# Altium PCB BOARD.PcbDoc
Units mm, origin at the board's own origin, x right, y up, seen from the top; angles counter-clockwise.
Board outline 25.6 x 34.2 mm, 2 copper layers (Top Layer, Bottom Layer), stack 0.46 mm thick; 48 components, 33 nets, 176 pads, 98 vias.
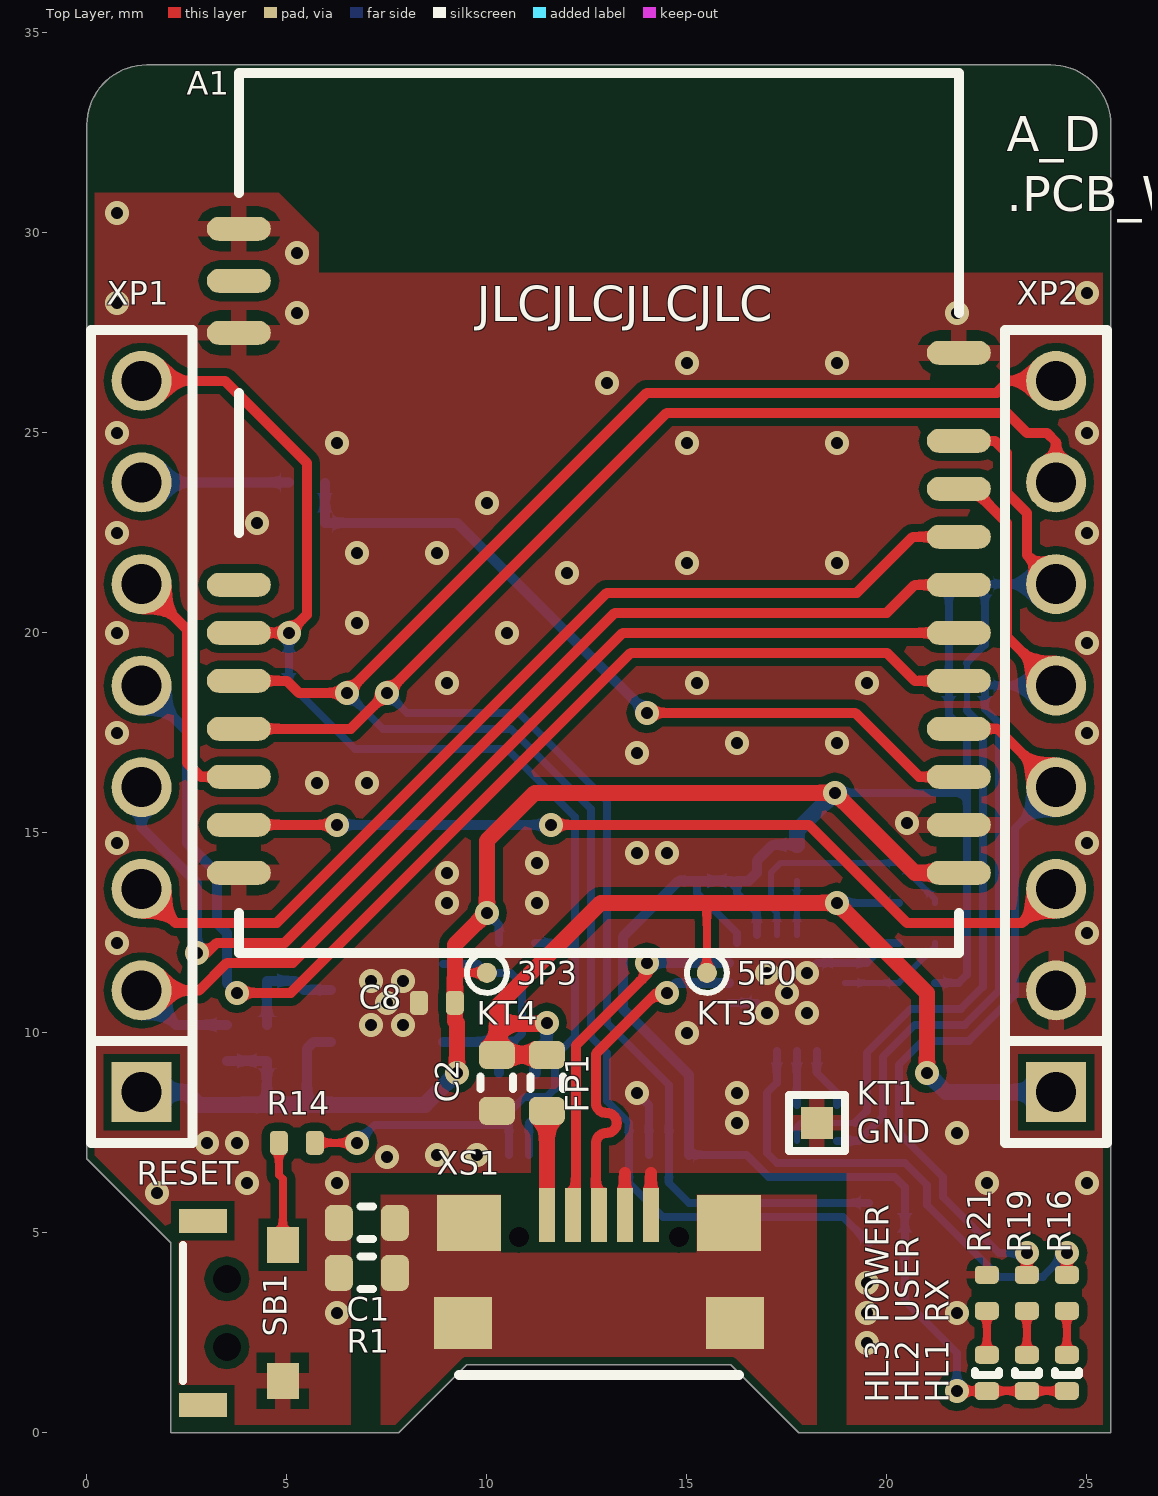
[diagram p0: Top Layer view]
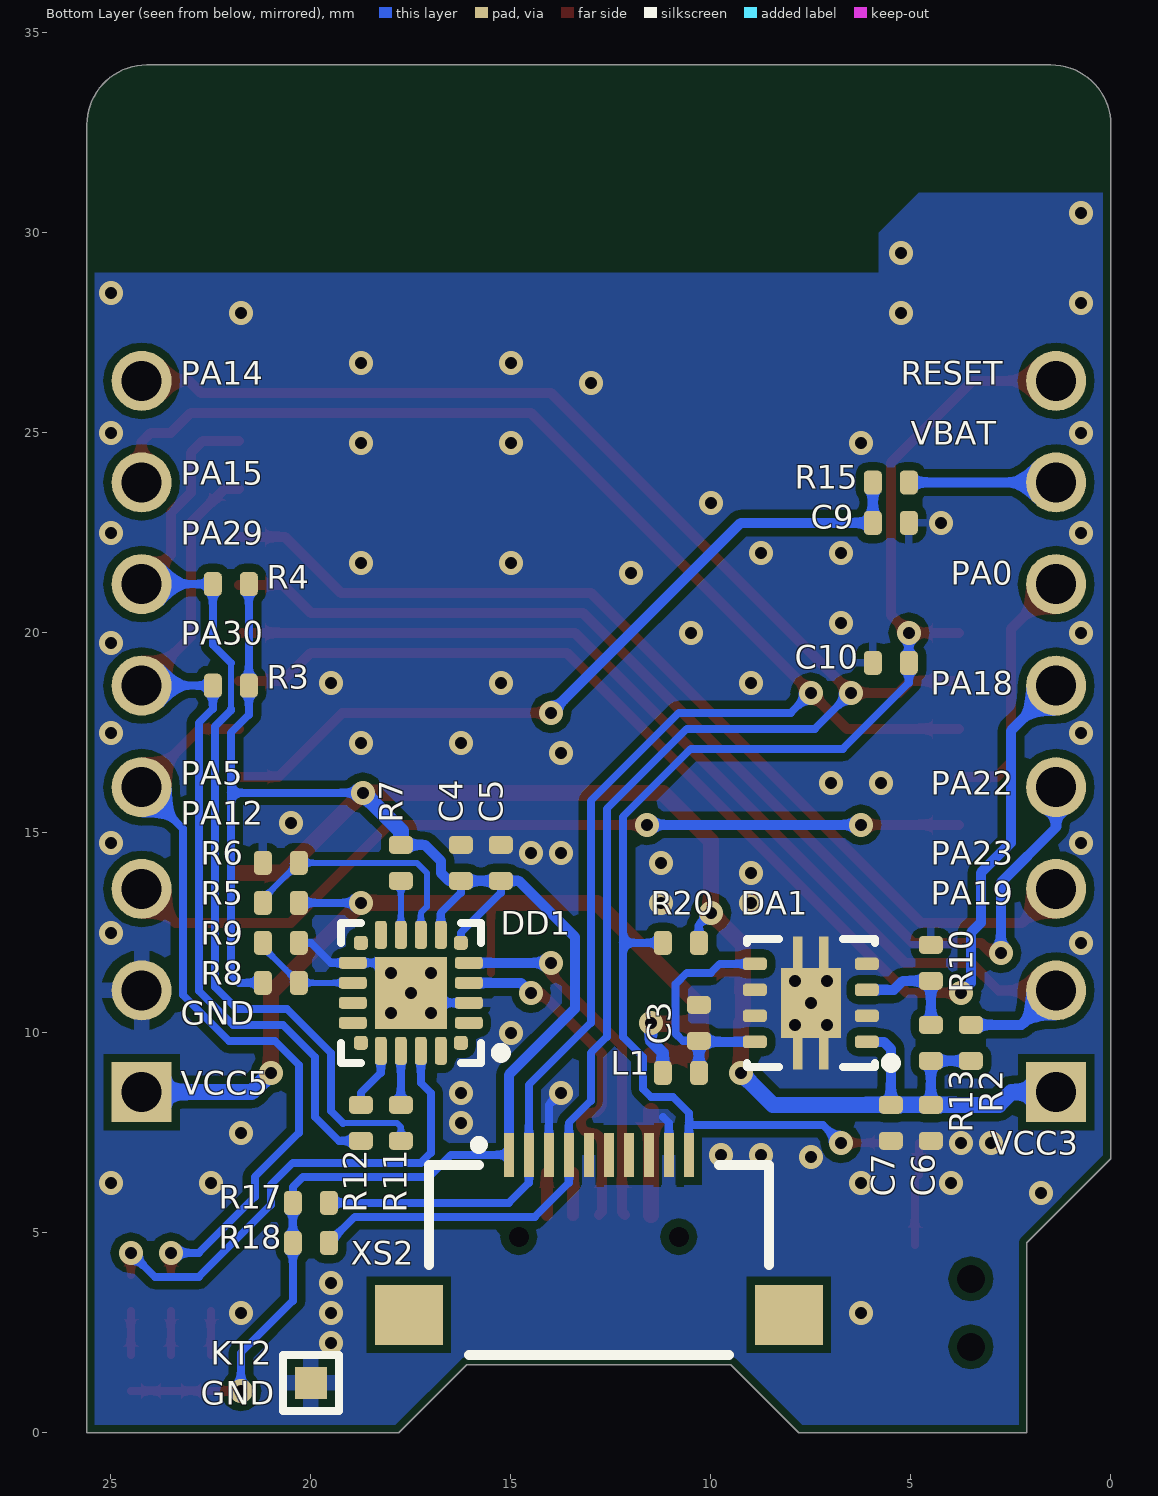
[diagram p1: Bottom Layer view, seen from below]
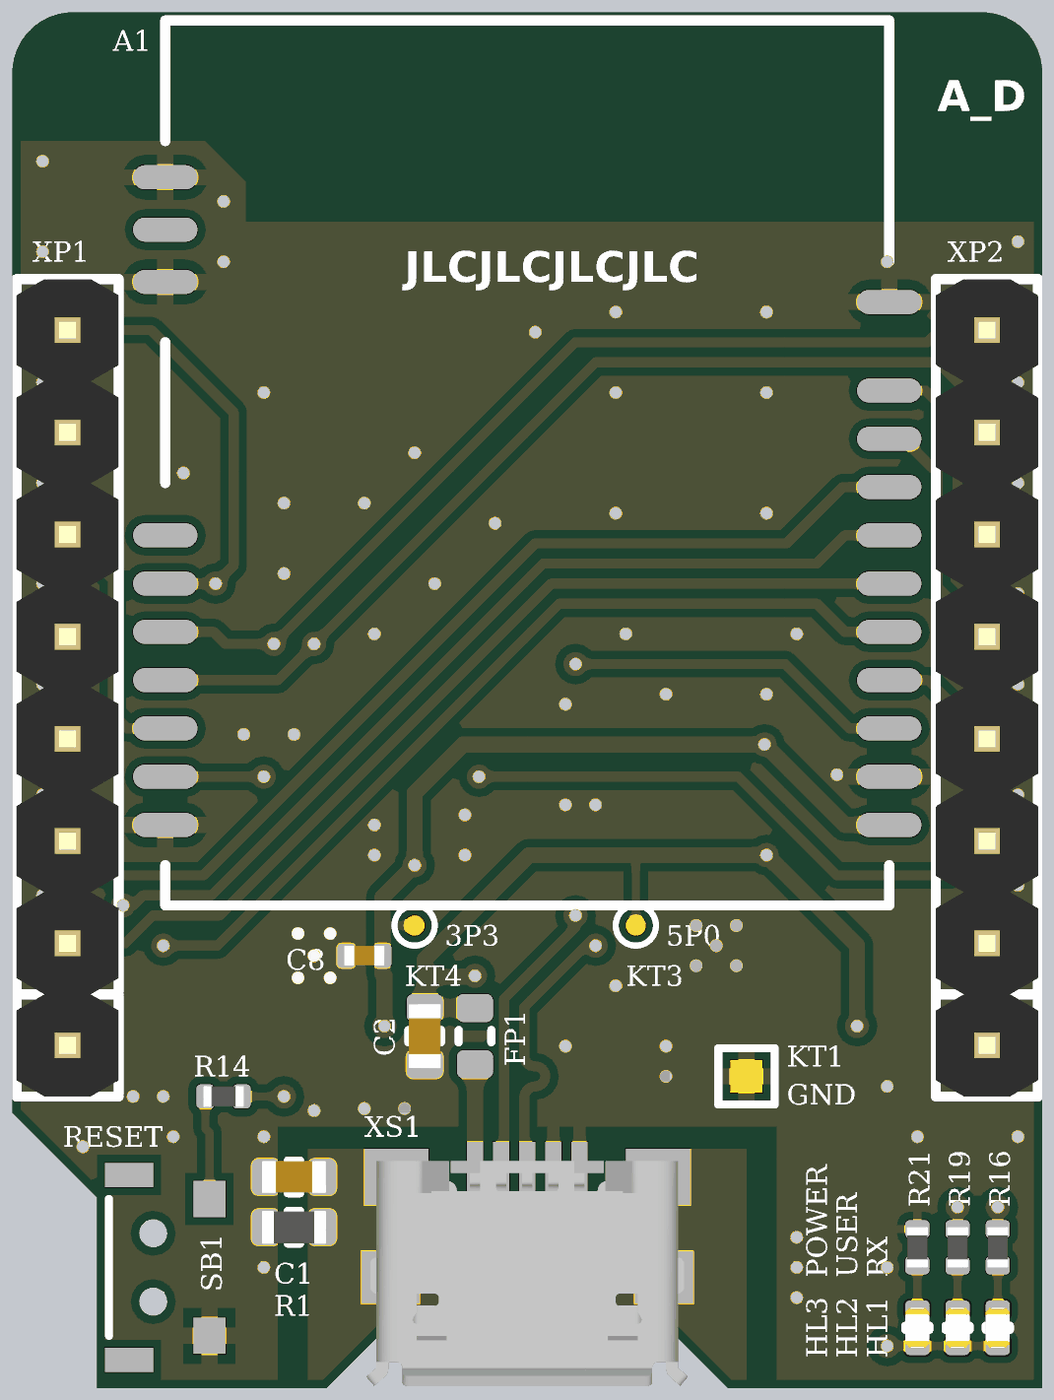
[diagram p2: 3D render of the assembled board from above, using the file's embedded part models]
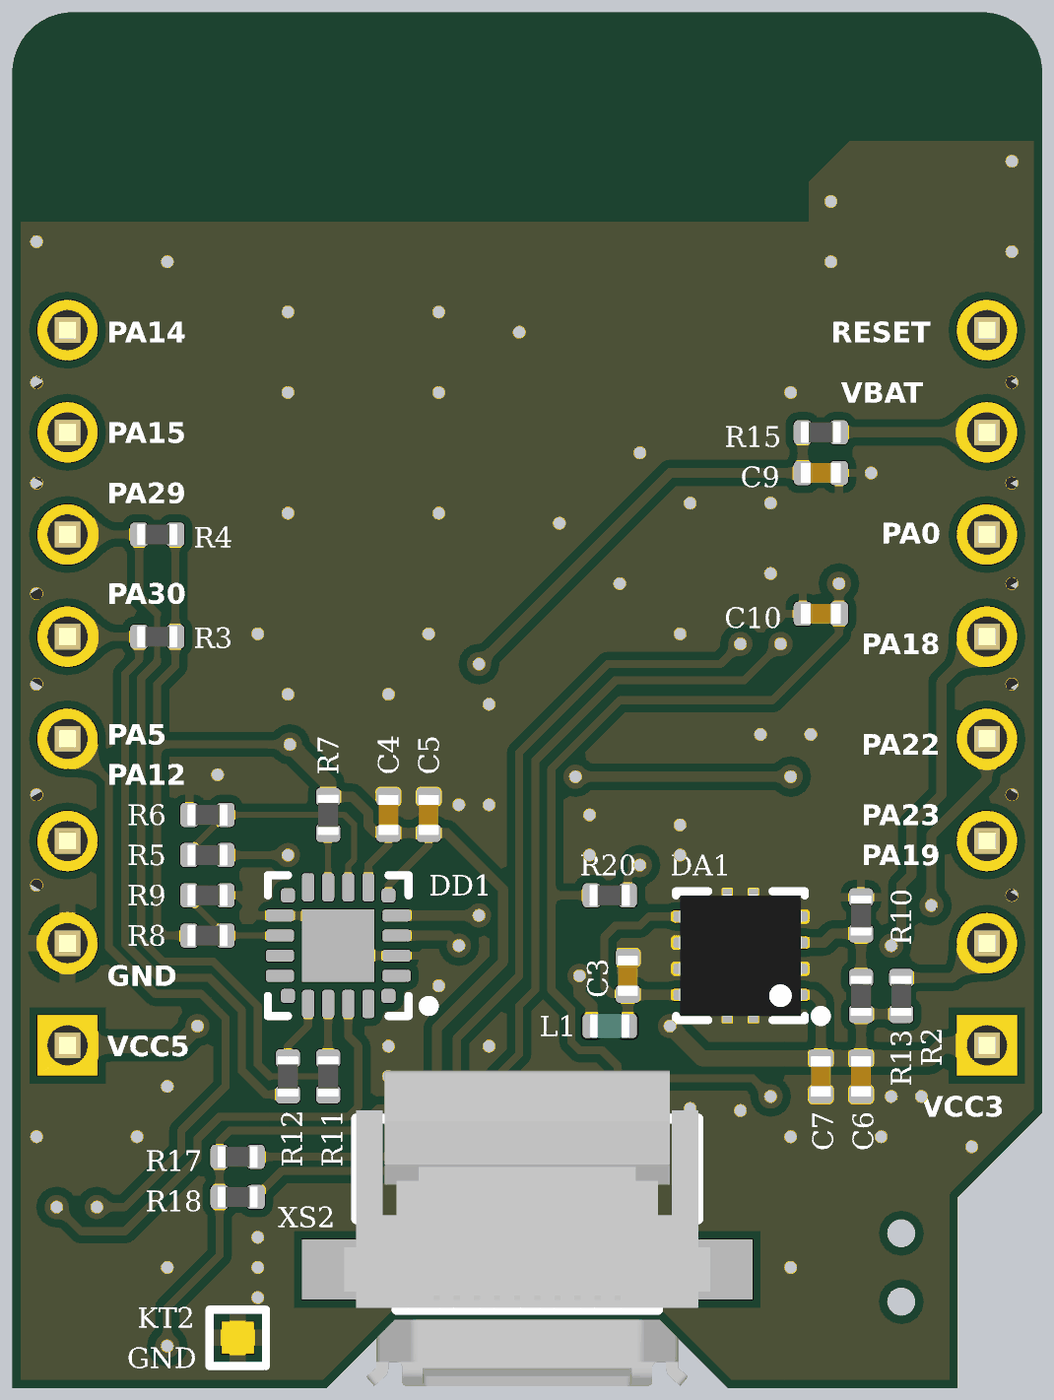
[diagram p3: 3D render of the assembled board from below, using the file's embedded part models]

## Layer stack, top to bottom
Top Solder: solder mask 0.01, Solder Resist, Dk 3.5
Top Layer: signal copper 0.03
Dielectric1: core 0.4, FR-4, Dk 4.2
Bottom Layer: signal copper 0.03
Bottom Solder: solder mask 0.01, Solder Resist, Dk 3.5

## Board outline
2.1,0 2.1,4.75 0,6.85 0,32.7 cw(c1.5,32.7) 1.5,34.2 24.1,34.2 cw(c24.1,32.7) 25.6,32.7 25.6,0 17.8,0 16.1,1.7 9.5,1.7 7.8,0

## Design rules (kind name [scope] priority, off if disabled: settings)
BoardOutlineClearance [All] p1: gap=0.2 ignorepadtopadclearanceinfootprint=FALSE
Clearance Clearance_ANT [InNetClass('ANT_Class') vs InPolygon] p1: gap=0.6 ignorepadtopadclearanceinfootprint=FALSE except(0: Arc-Hole Track-Hole SMDPad-Hole THPad-Hole Via-Hole Fill-Hole Poly-Hole Region-Hole Text-Hole)
Clearance Clearance_GND_Poly [(InNet('GND') AND InPolygon )] p2: gap=0.2 ignorepadtopadclearanceinfootprint=FALSE except(0: Arc-Hole Track-Hole SMDPad-Hole THPad-Hole Via-Hole Fill-Hole Poly-Hole Region-Hole Text-Hole)
Clearance [All] p3: gap=0.15 ignorepadtopadclearanceinfootprint=FALSE except(0: Arc-Hole Track-Hole SMDPad-Hole THPad-Hole Via-Hole Fill-Hole Poly-Hole Region-Hole Text-Hole)
ComponentClearance [All] p1 off: gap=0.25 collisioncheckmode=3 verticalgap=0.25 showdistances=FALSE
DiffPairsRouting [All] p1: maxlimit=0.4 minlimit=0.15 mostfreqgap=0.25 toplayer_minwidth=0.2 toplayer_maxwidth=0.4 toplayer_prefwidth=0.25 bottomlayer_minwidth=0.2 bottomlayer_maxwidth=0.4 bottomlayer_prefwidth=0.25 maxuncoupledlength=12
Height [All] p1: minheight=0 maxheight=25 prefheight=25
HoleSize [All] p1: absolutevalues=TRUE maxlimit=6 minlimit=0.3 maxpercent=80.000 minpercent=20.000
HoleToHoleClearance [All] p1: gap=0.25 allowstackedmicrovias=TRUE
MatchedLengths "Schematic Matched Net Lengths_3" [InNet('USBD_N')] p1: tolerance=1 checknetsindiffpair=TRUE checkdiffpairvsdiffpair=FALSE checkxsignals=FALSE checkothers=FALSE
MatchedLengths "Schematic Matched Net Lengths_2" [InNet('USBD_P')] p2: tolerance=1 checknetsindiffpair=TRUE checkdiffpairvsdiffpair=FALSE checkxsignals=FALSE checkothers=FALSE
MinimumSolderMaskSliver [All] p1 off: minsoldermaskwidth=0.254
PlaneClearance [All] p1: clearance=0.5
PlaneConnect [All] p1: planeconnectstyle=Relief reliefexpansion=0.5 reliefentries=4 reliefconductorwidth=0.25 reliefairgap=0.25
PolygonConnect PolygonConnect_DirectConnect [InComponentClass('DirectConnect')] p1: connectstyle=Direct reliefconductorwidth=0.254 reliefentries=4 polygonreliefangle="90 Angle" airgapwidth=0.254
PolygonConnect PolygonConnect_Components [InComponent('C*') OR InComponent('R*') OR InComponent('NR*') OR InComponent('DA*') OR InComponent('DD*') OR InComponent('HL*')] p2: connectstyle=Relief reliefconductorwidth=0.2 reliefentries=4 polygonreliefangle="90 Angle" airgapwidth=0.2
PolygonConnect PolygonConnect_Connectors [All vs (InPadClass('All Pads'))] p3: connectstyle=Relief reliefconductorwidth=0.4 reliefentries=4 polygonreliefangle="90 Angle" airgapwidth=0.25
PolygonConnect PolygonConnect_Via [All] p4: connectstyle=Direct reliefconductorwidth=0.254 reliefentries=4 polygonreliefangle="90 Angle" airgapwidth=0.254
RoutingCorners [All] p1: cornerstyle=45-Degree minsetback=1.5 maxsetback=3.5
RoutingVias [All] p1: holewidth=0.6 width=1.2 viastyle="Through Hole" minholewidth=0.3 minwidth=0.6 maxholewidth=1 maxwidth=2
SMDEntry [All] p1: side=TRUE corner=TRUE anyangle=TRUE
SilkToSilkClearance [All] p1 off: silktosilkclearance=0.254
SilkToSolderMaskClearance [IsPad] p1 off: minsilkscreentomaskgap=0.254 clearancetoexposedcopper=TRUE
SolderMaskExpansion [All] p1: expansion=0.025
Width [All] p1: maxlimit=8 minlimit=0.15 preferedwidth=0.6
Width Width_TrackEnds [All] p2 off: maxlimit=0.25 minlimit=0.25 preferedwidth=0.25 checkconnectedcopper=TRUE
19 further rules are at their usual default settings.

## Classes and differential pairs
component class DirectConnect: C1 C2 C3 C4 C5 C6 C7 C8 DA1 L1 R1 XS1
differential pair class USB: USBD
differential pair USBD: +USBD_P -USBD_N

## Components (designator, comment, footprint, x,y, rotation, side; value= is the part's Value field where it differs from the comment)
A1 "AFW121TI" AFW121TI 12.8,23 r0 top locked
C1 "Capacitor" C0603_L 7,5.25 r0 top value=0.1uF
C2 "Capacitor" C0603_L 10.25,8.75 r90 top value=10uF
C3 "Capacitor" C0402_L 10.3,10.25 r270 bottom value=4.7uF
C4 "Capacitor" C0402_L 16.25,14.25 r270 bottom value=4.7uF
C5 "Capacitor" C0402_L 15.25,14.25 r270 bottom value=0.1uF
C6 "Capacitor" C0402_L 4.5,7.75 r90 bottom value=4.7uF
C7 "Capacitor" C0402_L 5.5,7.75 r90 bottom value=4.7uF
C8 "Capacitor" C0402_L 8.75,10.75 r0 top value=4.7uF
C9 "Capacitor" C0402_L 5.5,22.75 r0 bottom value=100pF
C10 "Capacitor" C0402_L 5.5,19.25 r180 bottom value=0.1uF
DA1 "TPS73701DRB" VSON-8_065P300X300X100_N 7.5,10.75 r90 bottom value=TPS73701DRBR
DD1 "CP2102N-xxx-GQFN20" QFN-20_050P300X300X080_N 17.5,11 r0 bottom value=CP2102N-A01-GQFN20
FP1 "Fuse_PTC" F0603_L_H075 11.5,8.75 r90 top value=0603L100SLYR
HL1 "RX" LD0402_L 24.5,1.5 r90 top value=KPHHS-1005SURCK
HL2 "USER" LD0402_L 23.5,1.5 r90 top value=KPHHS-1005QBC-D-V
HL3 "POWER" LD0402_L 22.5,1.5 r90 top value=KPHHS-1005CGCK
KT1 "GND" TP-SMT-R-0.8mm 18.25,7.75 r0 top value=TestPoint-SMT
KT2 "GND" TP-SMT-R-0.8mm 20,1.25 r180 bottom value=TestPoint-SMT
KT3 "5P0" TP-SMT-C-0.5mm 15.5,11.5 r0 top value=TestPoint-SMT
KT4 "3P3" TP-SMT-C-0.5mm 10,11.5 r0 top value=TestPoint-SMT
L1 "FerriteBead" L0402_L 10.75,9 r180 bottom value=BLM15PD121SN1D
R1 "Resistor" R0603_L 7,4 r0 top value=0
R2 "Resistor" R0402_L 3.5,9.75 r90 bottom value=10k
R3 "Resistor" R0402_L 22,18.68 r0 bottom value=10k
R4 "Resistor" R0402_L 22,21.22 r0 bottom value=10k
R5 "Resistor" R0402_L 20.75,13.25 r0 bottom value=22.1k
R6 "Resistor" R0402_L 20.75,14.25 r180 bottom value=47k
R7 "Resistor" R0402_L 17.75,14.25 r90 bottom value=10k
R8 "Resistor" R0402_L 20.75,11.25 r0 bottom value=10k
R9 "Resistor" R0402_L 20.75,12.25 r0 bottom value=0
R10 "Resistor" R0402_L 4.5,11.75 r270 bottom value=12k
R11 "Resistor" R0402_L 17.75,7.75 r270 bottom value=0
R12 "Resistor" R0402_L 18.75,7.75 r270 bottom value=0
R13 "Resistor" R0402_L 4.5,9.75 r270 bottom value=22.1k
R14 "Resistor" R0402_L 5.25,7.25 r0 top value=20
R15 "Resistor" R0402_L 5.5,23.76 r180 bottom value=100
R16 "Resistor" R0402_L 24.5,3.5 r270 top value=1k
R17 "Resistor" R0402_L 20,5.75 r180 bottom value=10k
R18 "Resistor" R0402_L 20,4.75 r180 bottom value=10k
R19 "Resistor" R0402_L 23.5,3.5 r270 top value=1k
R20 "Resistor" R0402_L 10.75,12.25 r0 bottom value=10k
R21 "Resistor" R0402_L 22.5,3.5 r270 top value=1k
SB1 "RESET" 1TS003B-Series 3.5,3 r90 top locked value=1TS003B-1600-3500A-CT
XP1 "Text" PLS-8 1.37,17.41 r90 top locked value=PLS-8
XP2 "Text" PLS-8 24.23,17.41 r90 top locked value=PLS-8
XS1 "Text" 1981568-1 12.8,3 r0 top locked value=1981568-1
XS2 "JTAG" XF2M-1015-1A 12.8,4.7 r0 bottom locked value=XF2M-1015-1A

## Footprints (in the part's own frame and the unit in brackets; to place one, negate y for a bottom-side part, rotate by r counter-clockwise, add the part's x,y. Pads: shape width x height; smd on the part's side, far side on the other; paste and mask are expansions set on the pad)
1TS003B-Series [mm]
  rect 0.6x1.2 smd: 0(-2.3,0.6) 0(2.3,0.6)
  round 0.1 hole 0.7 unplated: 0(-0.85,0) 0(0.85,0)
  rect 0.9x0.8 smd: 1(-1.7,-1.4) 2(1.7,-1.4)
  silkscreen extent -1.7,1.1 1.7,1.1
1981568-1 [mm]
  round 0 hole 0.5 unplated: 0(-2,1.9) 0(2,1.9)
  rect 0.4x1.35 smd: 1(-1.3,2.45) 2(-0.65,2.45) 3(0,2.45) 4(0.65,2.45) 5(1.3,2.45)
  rect 1.45x1.3 smd: 6(-3.4,-0.25) 6(3.4,-0.25)
  rect 1.6x1.4 smd: 6(-3.25,2.25) 6(3.25,2.25)
  silkscreen extent -3.5,-1.55 3.5,-1.55, body extent -4,-2.95 4,2.65, height 2.79
AFW121TI [mm]
  oval 1.6x0.6 smd: 1(-9,7.1) 2(-9,5.8) 3(-9,4.5) 4(-9,-1.8) 5(-9,-3) 6(-9,-4.2) 7(-9,-5.4) 8(-9,-6.6) 9(-9,-7.8) 10(-9,-9) 11(9,-9) 12(9,-7.8) 13(9,-6.6) 14(9,-5.4) 15(9,-4.2) 16(9,-3) 17(9,-1.8) 18(9,-0.6) 19(9,0.6) 20(9,1.8) 21(9,4)
  Top Layer pour cut-out: 10,6 10,11 -10,11 -10,8 -8,8 -7,7 -7,6
  Bottom Layer pour cut-out: 10,6 10,11 -10,11 -10,8 -8,8 -7,7 -7,6
  silkscreen extent -9,-11 9,11, body extent -9,-11 9,11, height 3
C0402_L [mm] "Chip Capacitor; Body 1.0 x 0.5 mm (LxW typ)"
  rrect50% 0.45x0.6 smd: 1(-0.45,0) 2(0.45,0)
  body extent -0.5,-0.25 0.5,0.25, height 0.61
C0603_L [mm] "Chip Capacitor; Body 1.6 x 0.8 mm (LxW typ)"
  rrect50% 0.7x0.9 smd: 1(-0.7,0) 2(0.7,0)
  silkscreen extent -0.15,-0.41 0.15,0.41, body extent -0.8,-0.4 0.8,0.4, height 0.91
F0603_L_H075 [mm] "1608M"
  rrect50% 0.7x0.9 smd: 1(-0.7,0) 2(0.7,0)
  silkscreen extent -0.15,-0.41 0.15,0.41, body extent -0.8,-0.4 0.8,0.4, height 0.75
L0402_L [mm] "Chip Coil; Body 1.0 x 0.5 mm (LxW typ)"
  rrect50% 0.45x0.6 smd mask+0.05: 1(-0.452,0) 2(0.452,0)
  body extent -0.5,-0.3 0.5,0.3, height 0.5
LD0402_L [mm] "Chip Led; Body 1.0 x 0.5 mm (LxW typ)"
  rrect50% 0.45x0.6 smd mask+0.05: 1(-0.452,0) 2(0.452,0)
  silkscreen extent -0.05,-0.3 0.05,0.3, body extent -0.5,-0.3 0.5,0.3, height 0.2
PLS-8 [mm]
  rect 1.5x1.5 hole 1: 1(-8.89,0)
  round 1.5 hole 1: 2(-6.35,0) 3(-3.81,0) 4(-1.27,0) 5(1.27,0) 6(3.81,0) 7(6.35,0) 8(8.89,0)
  silkscreen extent -10.16,-1.27 10.16,1.27, body extent -10.16,-1.27 10.16,1.27, height 8.9
QFN-20_050P300X300X080_N [mm]
  rrect50% 0.35x0.35 smd: 1(-1.25,1.25) 6(-1.25,-1.25) 11(1.25,-1.25) 16(1.25,1.25)
  rrect50% 0.7x0.3 smd: 2(-1.45,0.75) 3(-1.45,0.25) 4(-1.45,-0.25) 5(-1.45,-0.75) 12(1.45,-0.75) 13(1.45,-0.25) 14(1.45,0.25) 15(1.45,0.75)
  rrect50% 0.3x0.7 smd: 7(-0.75,-1.45) 8(-0.25,-1.45) 9(0.25,-1.45) 10(0.75,-1.45) 17(0.75,1.45) 18(0.25,1.45) 19(-0.25,1.45) 20(-0.75,1.45)
  rect 1.8x1.8 smd: TP(0,0)
  silkscreen extent -2.37,-1.75 1.75,1.75, body extent -1.5,-1.5 1.5,1.5, height 0.8
R0402_L [mm] "Chip Resistor; Body 1.0 x 0.5 mm (LxW typ)"
  rrect50% 0.45x0.6 smd: 1(-0.45,0) 2(0.45,0)
  body extent -0.5,-0.26 0.5,0.26, height 0.36
R0603_L [mm] "Chip Resistor; Body 1.6 x 0.8 mm (LxW typ)"
  rrect50% 0.7x0.9 smd: 1(-0.7,0) 2(0.7,0)
  silkscreen extent -0.15,-0.41 0.15,0.41, body extent -0.8,-0.41 0.8,0.41, height 0.46
TP-SMT-C-0.5mm [mm]
  round 0.5 smd paste-1: 1(0,0)
  silkscreen extent -0.5,-0.5 0.5,0.5
TP-SMT-R-0.8mm [mm]
  rect 0.8x0.8 smd paste-1: 1(0,0)
  silkscreen extent -0.7,-0.7 0.7,0.7
VSON-8_065P300X300X100_N [mm]
  rrect50% 0.31x0.6 smd paste-0.025: 1(-0.975,-1.4) 2(-0.325,-1.4) 3(0.325,-1.4) 4(0.975,-1.4) 5(0.975,1.4) 6(0.325,1.4) 7(-0.325,1.4) 8(-0.975,1.4)
  rect 0.825x0.23 smd: TP(-1.25,-0.325) TP(-1.25,0.325) TP(1.25,-0.325) TP(1.25,0.325)
  rect 1.75x1.5 smd: TP(0,0)
  silkscreen extent -1.62,-2.12 1.6,1.6, body extent -1.52,-1.52 1.52,1.52, height 1.04
XF2M-1015-1A [mm]
  rect 0.25x1.1 smd mask+0.025: 1(2.25,-2.25) 2(1.75,-2.25) 3(1.25,-2.25) 4(0.75,-2.25) 5(0.25,-2.25) 6(-0.25,-2.25) 7(-0.75,-2.25) 8(-1.25,-2.25) 9(-1.75,-2.25) 10(-2.25,-2.25)
  rect 1.7x1.5 smd mask+0.025: SH(-4.75,1.75) SH(4.75,1.75)
  silkscreen extent -4.25,-2.6 4.25,2.75, body extent -4.55,-3.2 4.55,2.7, height 2

## Part data
A1: Manufacturer=99IOT, Operation Frequency=62.5MHz, Supply Current=120mA, Working Temperature Max=+85°С, Working Temperature Min=-20°С, Application Category=1, I/O Lines=17, ID=6, Part Number=AFW121TI, Published=21.11.2019, Publisher="Andrew Danich", ROM/RAM=512KB/256KB, Supply Operation=+3.0…3.6V, Supported Interfaces="SWD, SPI, I2C, UART, PWM, ADC", Type=Модуль, Wireless Compatibility="802.11 b/g/n"
C1: library part GRM188R72A104KA35D, Dielectric Type=X7R, Manufacturer=Murata, Tolerance=±10%, Voltage=100V, Working Temperature Max=+125°С, Working Temperature Min=-55°С, Application Category=1, ClassName=DirectConnect, ID=232, Part Number=GRM188R72A104KA35D, Published=18.05.2010, Publisher="Andrew Danich", Type=Конденсатор
C2: library part GRM188R60J106ME47D, Dielectric Type=X5R, Manufacturer=Murata, Tolerance=±20%, Voltage=6.3V, Working Temperature Max=+85°С, Working Temperature Min=-55°С, Application Category=1, ClassName=DirectConnect, ID=136, Part Number=GRM188R60J106ME47D, Published=18.05.2010, Publisher="Andrew Danich", Type=Конденсатор
C3 C4 C6 C7 C8: library part GRM155R60J475ME87D, Dielectric Type=X5R, Manufacturer=Murata, Tolerance=±20%, Voltage=6.3V, Working Temperature Max=+85°С, Working Temperature Min=-55°С, Application Category=1, ClassName=DirectConnect, ID=223, Part Number=GRM155R60J475ME87D, Published=18.05.2010, Publisher="Andrew Danich", Type=Конденсатор
C5 C10: library part GCM155R71C104KA55D, Dielectric Type=X7R, Manufacturer=Murata, Tolerance=±10%, Voltage=16V, Working Temperature Max=+125°С, Working Temperature Min=-55°С, Application Category=1, Functional Analog=GRM155R71C104KA88D, ID=163, Part Number=GCM155R71C104KA55D, Published=18.05.2010, Publisher="Andrew Danich", Type=Конденсатор
  C5: ClassName=DirectConnect
C9: library part GCM1555C1H101FA16D, Dielectric Type=NP0, Manufacturer=Murata, Tolerance=±1%, Voltage=50V, Working Temperature Max=+125°С, Working Temperature Min=-55°С, Application Category=1, Functional Analog=GRM1555C1H101JA01D, ID=164, Part Number=GCM1555C1H101FA16D, Published=18.05.2010, Publisher="Andrew Danich", Type=Конденсатор
DA1: library part TPS73701DRBR, Input Voltage=+2.2…5.5V, Manufacturer="Texas Instruments", Output Current=1A, Output Voltage=+1.2…5.5V, Working Temperature Max=+125°С, Working Temperature Min=-40°С, Application Category=1, ClassName=DirectConnect, Functional Analog=TPS73701DRBT, ID=26, Part Number=TPS73701DRBR, Published=25.03.2019, Publisher="Andrew Danich", Type=Микросхема
DD1: library part CP2102N-A01-GQFN20, Manufacturer="Silicon Labs", Supply Current=13.7mA, Working Temperature Max=+85°C, Working Temperature Min=-40°C, Application Category=1, Channels=1, Functional Analog=CP2102N-A02-GQFN20, ID=14, Input Interface=UART, OTG Support=No, Part Number=CP2102N-A01-GQFN20, Published=16.07.2019, Publisher="Andrew Danich", Supply Operation=+3.0…3.6V, Type=Микросхема, USB Speed Support="12 Mb/s", USB Type Support="USB 2.0"
FP1: library part 0603L100SLYR, Current Rating Max=50A, Hold Current=1A, Limit Voltage=6V, Manufacturer=Littelfuse, Resistance=0.12ohm, Trip Current=1.8A, Working Temperature Max=+85°С, Working Temperature Min=-40°С, Application Category=1, Functional Analog=-, ID=13, Part Number=0603L100SLYR, Published=25.0.2017, Type="Предохранитель самовосстанавливающийся"
HL1: library part KPHHS-1005SURCK, Color=Red, Forward Current=20mA, Forward Voltage=2.5V, Manufacturer=Kingbright, Power Dissipation=75mW, Working Temperature Max=+85°С, Working Temperature Min=-40°С, Application Category=1, ID=35, Leds=1, Luminous Flux=140, Part Number=KPHHS-1005SURCK, Published=03.12.2013, Publisher="Andrew Danich", Type="Индикатор единичный"
HL2: library part KPHHS-1005QBC-D-V, Color=Blue, Forward Current=20mA, Forward Voltage=3.3V, Manufacturer=Kingbright, Power Dissipation=120mW, Working Temperature Max=+85°С, Working Temperature Min=-40°С, Application Category=1, ID=24, Leds=1, Luminous Flux=60, Part Number=KPHHS-1005QBC-D-V, Published=03.12.2013, Publisher="Andrew Danich", Type="Индикатор единичный"
HL3: library part KPHHS-1005CGCK, Color=Green, Forward Current=20mA, Forward Voltage=2.1V, Manufacturer=Kingbright, Power Dissipation=75mW, Working Temperature Max=+85°С, Working Temperature Min=-40°С, Application Category=1, ID=25, Leds=1, Luminous Flux=60, Part Number=KPHHS-1005CGCK, Published=03.12.2013, Publisher="Andrew Danich", Type="Индикатор единичный"
KT1 KT2: library part TestPoint-SMT-GND, Manufacturer=-, Application Category=1, Application Type="On PCB Test Point", Functional Analog=-, ID=7, Part Number=TestPoint-SMT-GND, Published=03.03.2015, Publisher="Andrew Danich"
KT3 KT4: library part TestPoint-SMT, Manufacturer=-, Application Category=1, Application Type="On PCB Test Point", Functional Analog=-, ID=6, Part Number=TestPoint-SMT, Published=03.03.2015, Publisher="Andrew Danich"
L1: library part BLM15PD121SN1D, DC Resistance=0.09ohm, Inductor Type=EMIFIL, Manufacturer=Murata, Rated Current=1.3A, Tolerance=±25%, Working Temperature Max=+125°С, Working Temperature Min=-55°С, Application Category=1, ClassName=DirectConnect, ID=11, Impedance at 100Mhz=120ohm, Part Number=BLM15PD121SN1D, Published=14.11.2014, Publisher="Andrew Danich", Type=Дроссель
R1: library part RC0603JR-070R, Limit Voltage=50V, Manufacturer=Yageo, Temperature Coefficient=100ppm, Tolerance=±5%, Total Power Dissipation=0.1W, Working Temperature Max=+155°С, Working Temperature Min=-55°С, Application Category=1, ClassName=DirectConnect, Functional Analog="RC0603FR-070RL, CR0603-J/-000E", ID=5, Part Number=RC0603JR-070R, Published=24.03.2010, Publisher="Andrew Danich", Series Type=Thick-Film, Type=Резистор
R2 R3 R4 R7 R8 R17 R18 R20: library part RC0402JR-0710KL, Limit Voltage=50V, Manufacturer=Yageo, Temperature Coefficient=100ppm, Tolerance=±5%, Total Power Dissipation=0.1W, Working Temperature Max=+155°С, Working Temperature Min=-55°С, Application Category=1, ID=476, Part Number=RC0402JR-0710KL, Published=24.03.2010, Publisher="Andrew Danich", Series Type=Thick-Film, Type=Резистор
R5 R13: library part RC0402FR-0722K1L, Limit Voltage=50V, Manufacturer=Yageo, Temperature Coefficient=100ppm, Tolerance=±1%, Total Power Dissipation=0.1W, Working Temperature Max=+155°С, Working Temperature Min=-55°С, Application Category=1, ID=447, Part Number=RC0402FR-0722K1L, Published=24.03.2010, Publisher="Andrew Danich", Series Type=Thick-Film, Type=Резистор
R6: library part RC0402FR-0747KL, Limit Voltage=50V, Manufacturer=Yageo, Temperature Coefficient=100ppm, Tolerance=±1%, Total Power Dissipation=0.1W, Working Temperature Max=+155°С, Working Temperature Min=-55°С, Application Category=1, ID=528, Part Number=RC0402FR-0747KL, Published=24.03.2010, Publisher="Andrew Danich", Series Type=Thick-Film, Type=Резистор
R9 R11 R12: library part RC0402JR-070RL, Limit Voltage=50V, Manufacturer=Yageo, Temperature Coefficient=100ppm, Tolerance=±5%, Total Power Dissipation=0.1W, Working Temperature Max=+155°С, Working Temperature Min=-55°С, Application Category=1, ID=362, Part Number=RC0402JR-070RL, Published=24.03.2010, Publisher="Andrew Danich", Series Type=Thick-Film, Type=Резистор
R10: library part RC0402FR-0712KL, Limit Voltage=50V, Manufacturer=Yageo, Temperature Coefficient=100ppm, Tolerance=±1%, Total Power Dissipation=0.1W, Working Temperature Max=+155°С, Working Temperature Min=-55°С, Application Category=1, ID=318, Part Number=RC0402FR-0712KL, Published=24.03.2010, Publisher="Andrew Danich", Series Type=Thick-Film, Type=Резистор
R14: library part RC0402JR-0720RL, Limit Voltage=50V, Manufacturer=Yageo, Temperature Coefficient=100ppm, Tolerance=±5%, Total Power Dissipation=0.1W, Working Temperature Max=+155°С, Working Temperature Min=-55°С, Application Category=1, ID=369, Part Number=RC0402JR-0720RL, Published=24.03.2010, Publisher="Andrew Danich", Series Type=Thick-Film, Type=Резистор
R15: library part RC0402JR-07100RL, Limit Voltage=50V, Manufacturer=Yageo, Temperature Coefficient=100ppm, Tolerance=±5%, Total Power Dissipation=0.1W, Working Temperature Max=+155°С, Working Temperature Min=-55°С, Application Category=1, ID=479, Part Number=RC0402JR-07100RL, Published=24.03.2010, Publisher="Andrew Danich", Series Type=Thick-Film, Type=Резистор
R16 R19 R21: library part RC0402JR-071KL, Limit Voltage=50V, Manufacturer=Yageo, Temperature Coefficient=100ppm, Tolerance=±5%, Total Power Dissipation=0.1W, Working Temperature Max=+155°С, Working Temperature Min=-55°С, Application Category=1, ID=3, Part Number=RC0402JR-071KL, Published=24.03.2010, Publisher="Andrew Danich", Series Type=Thick-Film, Type=Резистор
SB1: library part 1TS003B-1600-3500A-CT, Isolator Resistance=100meg, Limit Current=50mA, Limit Voltage=12V, Manufacturer="Hongyuan Precision", Resistance=0.1ohm, Application Category=1, Backlight=NO, Functional Analog=1TS003B-1800-3500A-CT, Height=1.82mm, ID=38, Number of Contacts=2, Part Number=1TS003B-1600-3500A-CT, Published=17.04.2014, Publisher="Andrew Danich", Type=Переключатель
XP1 XP2: library part PLS-8, Limit Current=3A, Limit Voltage=250V, Resistance=15momh, Application Category=1, Connector Type=Male, ID=7, Part Number=PLS-8, Pins=8, Pitch=2.54mm, Published=07.03.2013, Publisher="Andrew Danich", Surface Finish=Gold, Type=Вилка
XS1: library part 1981568-1, Limit Current=1A, Limit Voltage=24V, Manufacturer="TE Connectivity", Application Category=1, ClassName=DirectConnect, Connector Type=Female, ID=30, Interface="USB 2.0", Max Data Rate="480 mbps", Mount Type=Surface, Part Number=1981568-1, Pins=9, Published=11.04.2016, Publisher="Andrew Danich", Type=Розетка
XS2: library part XF2M-1015-1A, Limit Current=500mA, Limit Voltage=50V, Manufacturer="Omron Electronics", Resistance=0.05ohm, Working Temperature Max=+85°С, Working Temperature Min=-30°С, Application Category=1, Connector Type=Female, ID=7, Part Number=XF2M-1015-1A, Pins=10, Pitch=0.5mm, Published=07.09.2015, Publisher="Viktor Klishin", Series=FPC, Type=Розетка

## Via types
v1: diameter 0.6, hole 0.3, Top Layer to Bottom Layer, tented both sides, 98 vias

## Nets (pads, with @x,y where several pads share a name; then routed paths per layer and width w, separated by ;. In a path a pad name is that pad's centre, name@x,y a point inside that pad or via, vN(x,y) a via of type N, cw(c..) or ccw(c..) an arc to the next point about the centre after c; other vN are vias at no path point)
GND: A1.1 A1.3 A1.10 A1.12 A1.21 C1.1 C2.1 C3.1 C4.1 C5.1 C6.1 C7.1 C8.1 C9.1 C10.1 DA1.2 DA1.4 DA1.6 DA1.7 DA1.TP DD1.3 DD1.12 DD1.TP KT1.1 KT2.1 R1.1 R6.1 R9.1 R10.1 R21.1 SB1.1 XP2.2 XS1.4 XS1.5 XS2.3 XS2.5 XS2.9 | length 8.5
  Top Layer w0.3: XS1.4 13.45,6.5 ; XS1.5 14.1,6.5
  Bottom Layer w0.2: XS2.9 11.05,7.75 11.2,7.9 ; v1(13.75,8.5) 14.05,8.2 XS2.3 ; DD1.3 16.75,10.75 v1(17,10.5) ; v1(18,11.5) 18.25,11.75 DD1.12 19.5,11.75 20,12.25 R9.1
  other v1: 19.5,2.25 6.25,3 19.5,3 21.75,3 19.5,3.75 1.75,6 4,6.25 6.25,6.25 22.5,6.25 25,6.25 7.5,6.9 8.75,6.95 9.75,6.95 3,7.25 3.75,7.25 21.75,7.5 16.25,7.75 16.25,8.5 15,10 7.1,10.2 7.9,10.2 18,10.5 7.5,10.75 17.5,11 7.1,11.3 7.9,11.3 17,11.5 0.75,12.25 25,12.5 9,13.25 11.25,13.25 9,14 11.25,14.25 13.75,14.5 14.5,14.5 0.75,14.75 25,14.75 20.5,15.25 5.75,16.25 7,16.25 13.75,17 16.25,17.25 18.75,17.25 0.75,17.5 25,17.5 9,18.75 15.25,18.75 19.5,18.75 25,19.75 0.75,20 10.5,20 6.75,20.25 12,21.5 15,21.75 18.75,21.75 6.75,22 8.75,22 0.75,22.5 25,22.5 4.25,22.75 10,23.25 6.25,24.75 15,24.75 18.75,24.75 0.75,25 25,25 13,26.25 15,26.75 18.75,26.75 5.25,28 21.75,28 0.75,28.25 25,28.5 5.25,29.5 0.75,30.5
LED_RX_N: DD1.19 R16.1 | length 12.5
  Top Layer w0.2: R16.1 v1(24.5,4.5)
  Bottom Layer w0.2: DD1.19 17.25,8.75 17,8.5 17,7 17.25,6.75 20.45,6.75 21,6.2 21,5.7 22.8,3.9 23.9,3.9 v1(24.5,4.5)
NetA1_13: A1.13 C9.2 R15.1 | length 19.5
  Top Layer w0.25: v1(14,18) 19.21,18 20.81,16.4 A1.13
  Bottom Layer w0.25: R15.1@5.95,23.75 C9.2 9.25,22.75 v1(14,18)
NetC3_2: C3.2 DA1.5 DA1.8 L1.2 | length 6.3
  Bottom Layer w0.2: DA1.5 9.775,11.725 10,11.5 10.6,11.5 10.883,11.217 10.883,9.983 10.7,9.8 C3.2
  Bottom Layer w0.25: DA1.8 10.273,9.775 10.298,9.8 L1.2
NetDA1_3: DA1.3 R10.2 R13.1 | length 2.8
  Bottom Layer w0.25: R13.1 R10.2 5.2,11.3 5.425,11.075 DA1.3
NetDD1_8: DD1.8 R5.2 R6.2 | length 6.3
  Bottom Layer w0.15: DD1.8 17.25,13 17.1,13.15 17.1,14 17.35,14.25 R6.2 21.2,13.35 R5.2
NetDD1_9: DD1.9 R7.1 | length 1.4
  Bottom Layer w0.15: DD1.9 R7.1
NetDD1_13: DD1.13 R8.1 R9.2 | length 2.7
  Bottom Layer w0.15: DD1.13 R8.1 21.2,12.15 R9.2
NetDD1_17: DD1.17 R12.1 | length 1.6
  Bottom Layer w0.2: DD1.17 18.25,9 18.75,8.5 R12.1
NetDD1_18: DD1.18 R11.1 | length 1.4
  Bottom Layer w0.2: R11.1 DD1.18
NetHL1_2: HL1.2 R16.2 | length 1.1
  Top Layer w0.2: HL1.2 R16.2
NetHL2_2: HL2.2 R19.2 | length 1.1
  Top Layer w0.2: HL2.2 R19.2
NetHL3_2: HL3.2 R21.2 | length 1.1
  Top Layer w0.2: HL3.2 R21.2
NetR14_1: R14.1 SB1.2 | length 2.6
  Top Layer w0.2: R14.1 4.8,6.45 4.9,6.35 SB1.2
PA0: A1.8 XP1.6 | length 6.4
  Top Layer w0.25: XP1.6 2.5,20.09 2.5,16.75 2.85,16.4 A1.8
PA5: A1.14 R19.1 XP2.4 | length 19.3
  Top Layer w0.2: R19.1 v1(23.5,4.5)
  Top Layer w0.25: A1.14 22.77,17.6 XP2.4
  Bottom Layer w0.2: v1(23.5,4.5) 22.8,4.5 21.4,5.9 21.4,6.4 20.3,7.5 20.3,9.2 20.9,9.8 22.05,9.8 23.2,10.95 23.2,15.11 XP2.4
PA12: A1.9 XP2.3 | length 21.8
  Top Layer w0.25: A1.9 v1(6.25,15.2) ; v1(11.6,15.2) 18.05,15.2 20.5,12.75 23.38,12.75 XP2.3
  Bottom Layer w0.25: v1(6.25,15.2) v1(11.6,15.2)
PA14: A1.6 R18.2 XP2.8 XS2.4 | length 47.5
  Top Layer w0.25: A1.6 5,18.8 5.3,18.5 v1(6.5,18.5) 14,26 22.75,26 23.05,26.3 XP2.8
  Bottom Layer w0.2: v1(6.5,18.5) 7.4,17.6 10.6,17.6 12.6,15.6 12.6,9.9 13,9.5 13,8.3 13.55,7.75 XS2.4 13.55,6.25 14.4,5.4 18.9,5.4 R18.2
PA15: A1.7 R17.2 XP2.7 XS2.2 | length 47
  Top Layer w0.25: A1.7 6.6,17.6 v1(7.5,18.5) 14.5,25.5 23,25.5 23.5,25 24,25 24.23,24.77 XP2.7
  Bottom Layer w0.2: v1(7.5,18.5) 8,18 10.8,18 13,15.8 13,10.25 14.55,8.7 XS2.2 14.55,6.25 15.05,5.75 R17.2
PA18: A1.15 XP1.5 | length 30.5
  Top Layer w0.25: v1(3.75,11) 5.1,11 13.6,19.5 20,19.5 20.7,18.8 A1.15
  Bottom Layer w0.25: XP1.5 2.5,17.55 2.5,14.75 3.25,14 3.25,12.75 3.5,12.5 3.5,11.25 v1(3.75,11)
PA19: A1.16 R2.2 XP1.2 | length 26.6
  Top Layer w0.25: XP1.2 2.81,11.06 3.5,11.75 5.15,11.75 13.4,20 A1.16
  Bottom Layer w0.25: XP1.2 2.23,10.2 R2.2
PA22: A1.17 XP1.4 | length 27.6
  Top Layer w0.25: v1(2.75,12) 3,12 3.25,12.25 4.95,12.25 13.2,20.5 20,20.5 20.7,21.2 A1.17
  Bottom Layer w0.25: XP1.4 1.37,15.13 2.75,13.75 v1(2.75,12)
PA23: A1.18 XP1.3 | length 24.8
  Top Layer w0.25: XP1.3 2.22,12.75 4.75,12.75 13,21 19.25,21 20.65,22.4 A1.18
PA29: A1.20 R4.2 R11.2 XP2.6 | length 24.6
  Top Layer w0.25: A1.20 22.7,24.8 23,24.5 23,23.5 23.5,23 23.5,21.95 XP2.6
  Bottom Layer w0.15: R11.2 17.75,7.65 17.85,7.75 19.2,7.75 ; 22,18.1 22,19.25
  Bottom Layer w0.2: 19.2,7.75 19.5,8.05 19.5,9.5 20.6,10.6 21.85,10.6 22.4,11.15 22.4,17.655 22,18.055 22,18.1 ; 22,19.25 22.45,19.7 R4.2 XP2.6
PA30: A1.19 R3.2 R12.2 XP2.5 | length 22.2
  Top Layer w0.25: A1.19 22.15,23.6 23,22.75 23,19.91 XP2.5
  Bottom Layer w0.2: R12.2 19.3,7.3 19.9,7.9 19.9,9.4 20.7,10.2 21.95,10.2 22.8,11.05 22.8,17.75 22.45,18.1 R3.2 XP2.5
RESET_N: A1.5 C10.2 R14.2 R20.2 XP1.8 XS2.10 | length 36
  Top Layer w0.2: R14.2 v1(6.75,7.25)
  Top Layer w0.25: XP1.8 3.45,26.3 5.5,24.25 5.5,20.45 v1(5.05,20) A1.5
  Bottom Layer w0.2: v1(5.05,20) C10.2 5.05,18.75 6.7,17.1 10.5,17.1 12.2,15.4 12.2,12.25 ; v1(6.75,7.25) 7.2,7.7 10.5,7.7 10.55,7.75 ; XS2.10 10.55,7.75 ; R20.2 12.2,12.25 ; 10.55,7.75 10.55,8 10.95,8.4 11.5,8.4 11.7,8.6 11.7,9.4 12.2,9.9 12.2,12.25
SH: C1.2 R1.2 XS1.6
USBD_N: DD1.5 XS1.2 | length 9.1
  Top Layer w0.25: XS1.2 12.225,5.525 12.225,9.682 14,11.457 v1(14,11.75)
  Bottom Layer w0.25: v1(14,11.75) DD1.5
USBD_P: DD1.4 XS1.3 | length 8.7
  Top Layer w0.25: XS1.3 12.725,5.525 12.725,7.225 cw(c13,7.225) 13,7.5 ccw(c13,7.75) 13.25,7.75 ccw(c13,7.75) 13,8 12.975,8 cw(c12.975,8.25) 12.725,8.25 12.725,9.475 14.25,11 v1(14.5,11)
  Bottom Layer w0.25: v1(14.5,11) 14.75,11.25 DD1.4
VBAT_MES: R15.2 XP1.7 | length 3.7
  Bottom Layer w0.25: XP1.7 R15.2
VBUS: FP1.1 XS1.1 | length 2.6
  Top Layer w0.4: XS1.1 FP1.1
VCC3P3: A1.11 C4.2 C5.2 C6.2 C7.2 C8.2 DA1.1 DD1.6 DD1.7 HL1.1 HL2.1 HL3.1 KT4.1 R2.1 R3.1 R4.1 R7.2 R8.2 R13.2 R17.1 R18.1 R20.1 XP1.1 XS2.1 | length 79.6
  Top Layer w0.2: 9.2,11.5 KT4.1 ; v1(21.75,1.048) HL3.1 HL2.1 HL1.1
  Top Layer w0.4: v1(9.25,9) 9.25,10.25 9.2,10.3 C8.2 9.2,11.5 9.2,12.2 v1(10,13) 10,14.8 11.2,16 v1(18.7,16) 20.7,14 A1.11
  Bottom Layer w0.2: v1(10,13) 10.3,12.7 R20.1 ; XS2.1 16.494,6.95 17.044,6.4 20.194,6.4 20.45,6.144 R17.1 R18.1 20.45,3.3 21.75,2 v1(21.75,1.048) ; C5.2 15.25,13.5 16.25,12.5 DD1.6 ; C4.2@16.25,13.65 16.25,13.5 16.75,13 DD1.7 ; v1(18.7,16) 22,16 ; R8.2 21.8,11.25 22,11.45 22,16 ; R4.1 R3.1 21.55,17.95 22,17.5 22,16
  Bottom Layer w0.25: XP1.1 1.39,8.5 2.5,8.5 ; R2.1 R13.2 C6.2 ; C7.2 5.5,9.6 5.675,9.775 DA1.1 ; XS2.1 15.05,8.95 13.4,10.6 13.4,12.4 14.8,13.8 C5.2 16.1,13.8 C4.2@16.25,13.65 ; C4.2 16.55,13.8 16.75,14 16.75,14.3 17.15,14.7 R7.2
  Bottom Layer w0.4: XP1.1 2.48,8.52 2.5,8.5 2.8,8.2 C6.2 C7.2 8.45,8.2 v1(9.25,9) ; R7.2 17.75,15.05 v1(18.7,16)
VCC5P0: C2.2 FP1.2 KT3.1 L1.1 R5.1 XP2.1 | length 26.6
  Top Layer w0.2: KT3.1 15.5,13.25
  Top Layer w0.4: FP1.2 C2.2 10.25,10.225 ; v1(11.5,10.25) 11.475,10.225 10.25,10.225 ; v1(21,9) 21,11 v1(18.75,13.25) 15.5,13.25 12.85,13.25 10.25,10.65 10.25,10.225
  Bottom Layer w0.2: v1(18.75,13.25) R5.1
  Bottom Layer w0.3: L1.1 11.202,9.502 11.5,9.8 v1(11.5,10.25)
  Bottom Layer w0.4: v1(21,9) 21.48,8.52 XP2.1
pads on no net: A1.2 A1.4 DD1.1 DD1.2 DD1.10 DD1.11 DD1.14 DD1.15 DD1.16 DD1.20 SB1.0 XS1.0 XS2.6 XS2.7 XS2.8 XS2.SH

## Polygon pours and split planes (outlines as drawn)
SH on Top Layer "SH_L01_P000" (solid, remove dead copper, pour order 0): 18.25,0 18.25,5.95 15.25,5.95 15.25,4.5 10.35,4.5 10.35,5.95 7.35,5.95 7.35,0
GND on Top Layer "GND_L01_P002" (solid, remove dead copper, pour order 2): 25.6,29 5.8,29 5.8,31 0,31 0,0 6.6,0 6.6,6.5 19,6.5 19,0 25.6,0
GND on Bottom Layer "GND_L02_P004" (solid, remove dead copper, pour order 4): 0,0 25.6,0 25.6,29 5.8,29 5.8,31 0,31
no net on Top Solder "GND_L02_P-001" (solid, remove dead copper): 0,31

## Silkscreen, mask and mechanical layers (free items; w line width, h text height)
Top Overlay:
  text "A_D" at 23,31.75 h1.5
  text ".PCB_Week" at 23,30.25 h1.5
  text "JLCJLCJLCJLC" at 9.75,27.5 h1.5
Bottom Overlay:
  text "RESET" at 5.25,26 h1
  text "PA14" at 23.25,26 h1
  text "VBAT" at 5,24.5 h1
  text "PA15" at 23.25,23.5 h1
  text "PA29" at 23.25,22 h1
  text "PA0" at 4,21 h1
  text "PA30" at 23.25,19.5 h1
  text "PA18" at 4.5,18.25 h1
  text "PA5" at 23.25,16 h1
  text "PA22" at 4.5,15.75 h1
  text "PA12" at 23.25,15 h1
  text "PA23" at 4.5,14 h1
  text "PA19" at 4.5,13 h1
  text "GND" at 23.25,10 h1
  text "VCC5" at 23.25,8.25 h1
  text "VCC3" at 3,6.75 h1
1 - Board Outline:
  the board outline again, w0.1
11 - Dementions (Top):
  lines w0.1: 12.8,0 12.8,4.5